# Altium PCB DigiTune.PcbDoc
Units mil, origin at the board's own origin, x right, y up, seen from the top; angles counter-clockwise.
Board outline 6194 x 2600 mil, 2 copper layers (Top Layer, Bottom Layer); 43 components, 27 nets, 237 pads, 0 vias.
Unrouted connection lines stored in the file: 2.
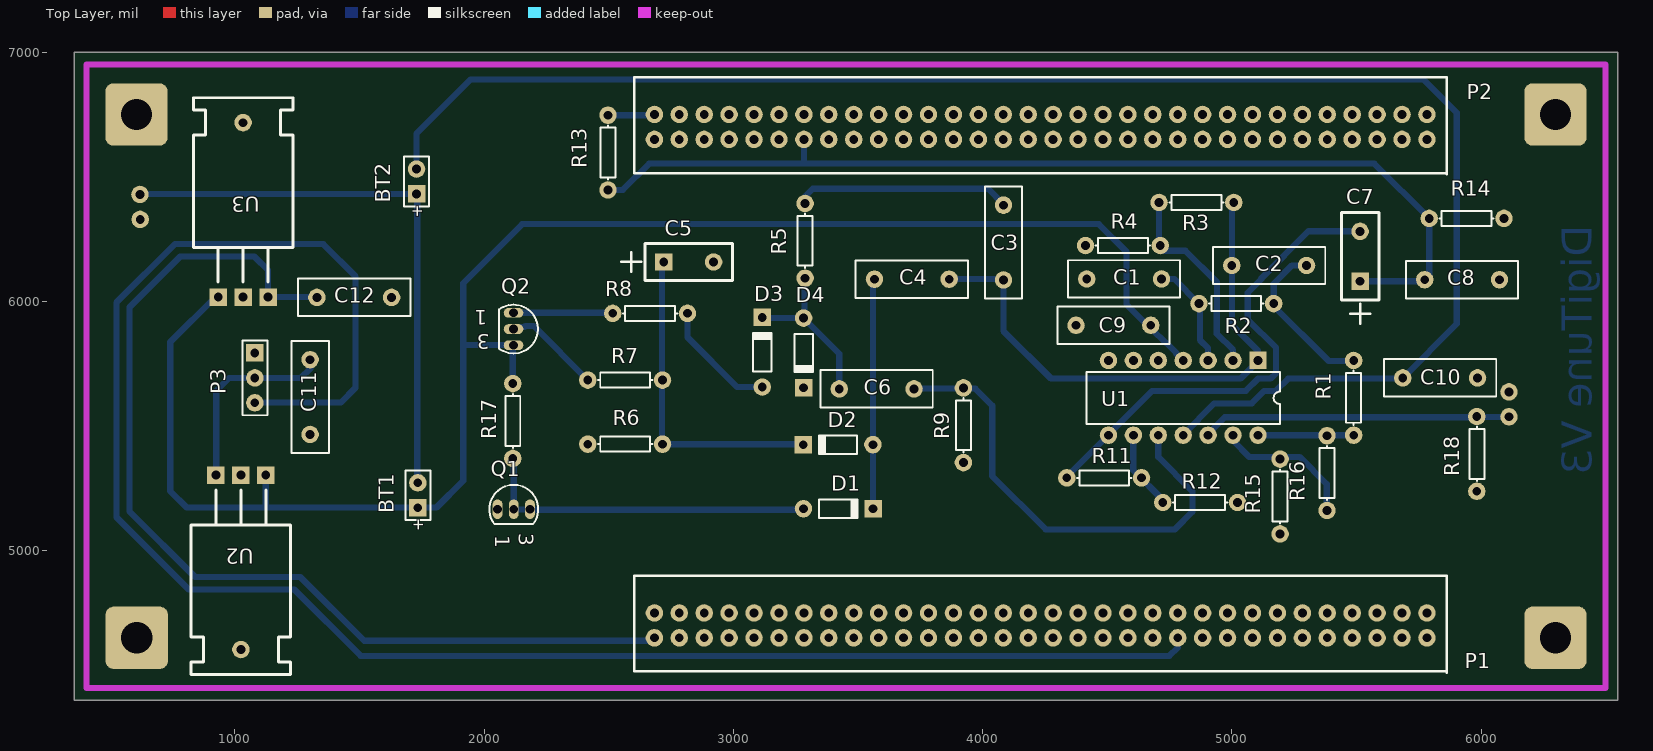
[diagram p0: Top Layer view]
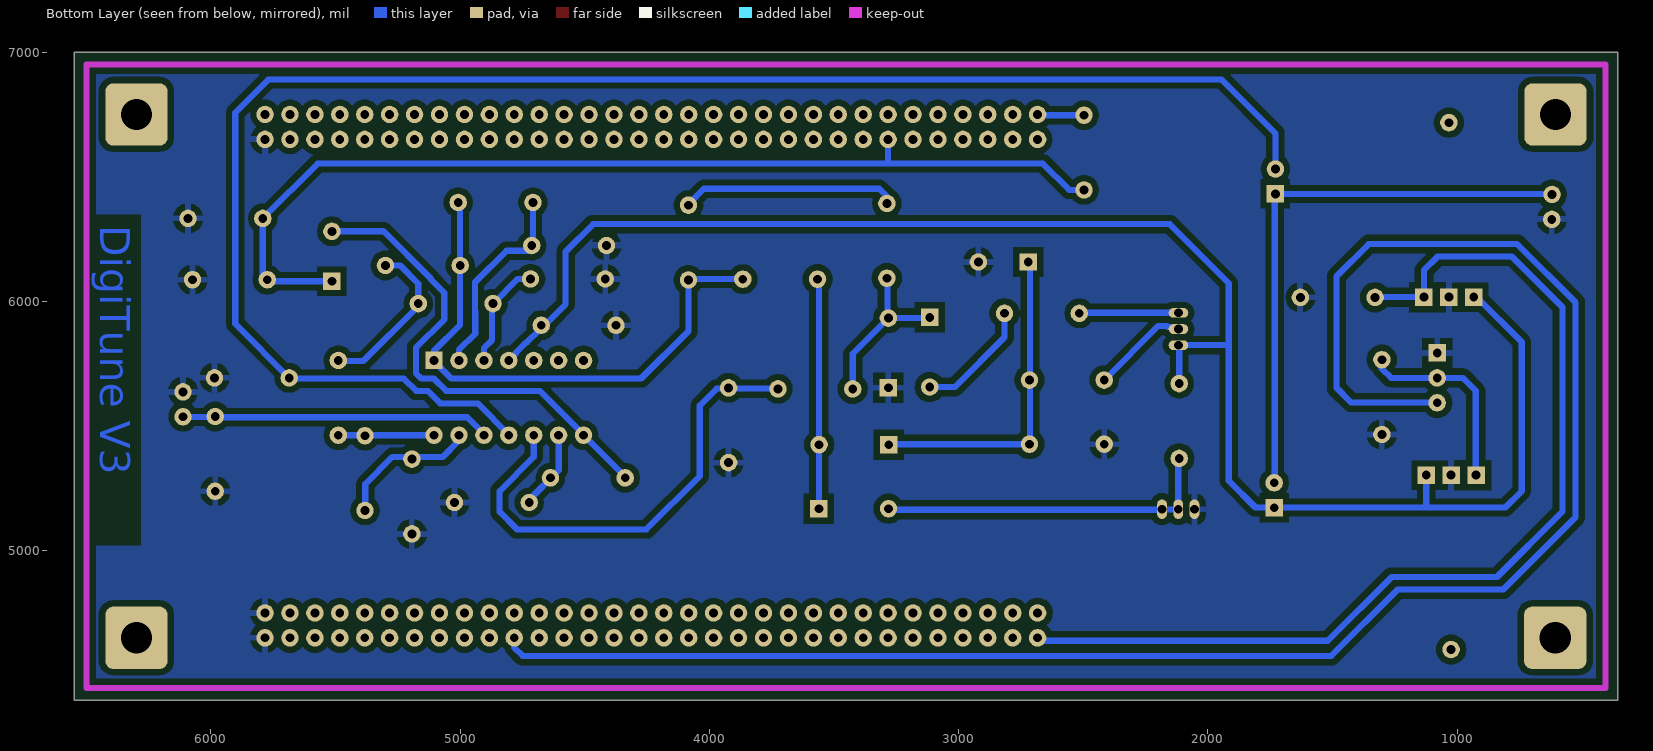
[diagram p1: Bottom Layer view, seen from below]

## Layer stack, top to bottom
Top Layer: signal copper 1.4
Dielectric: dielectric 12.6, FR-4, Dk 4.8
Bottom Layer: signal copper 1.4

## Board outline
355,4400 6549,4400 6549,7000 355,7000

## Design rules (kind name [scope] priority, off if disabled: settings)
Clearance [All] p1: gap=25
HoleSize [All] p1: absolutevalues=TRUE maxlimit=125 minlimit=1 maxpercent=80.000 minpercent=20.000
PlaneClearance [All] p1: clearance=25
PlaneConnect [All] p1: planeconnectstyle=Relief reliefexpansion=20 reliefentries=4 reliefconductorwidth=25 reliefairgap=20
PolygonConnect [All] p1: connectstyle=Relief reliefconductorwidth=25 reliefentries=4 polygonreliefangle="90 Angle" airgapwidth=25
RoutingLayers [All] p1: top layer_v5=FALSE bottom layer_v5=TRUE
RoutingVias [All] p1: holewidth=35 width=70 viastyle="Through Hole" minholewidth=28 minwidth=70 maxholewidth=35 maxwidth=70
SolderMaskExpansion [All] p1: expansion=4
Width [All] p1: maxlimit=30 minlimit=25 preferedwidth=30
24 further rules are at their usual default settings.

## Classes and differential pairs
component class STM32Headers: P1 P2

## Components (designator, comment, footprint, x,y, rotation, side; value= is the part's Value field where it differs from the comment)
BT1 "+9V" BAT-2 1734,5222 r90 top
BT2 "-9V" BAT-2 1729,6481 r90 top
C1 "15nF" RAD-0.3 4568,6090 r0 top
C2 "15nF" RAD-0.3 5150,6144 r180 top
C3 "220nF" RAD-0.3 4084,6236 r90 top
C4 "470nF" RAD-0.3 3716,6089 r180 top
C5 "2.2uF" RAD0.2-POL 2721,6158 r0 top
C6 "220nF" RAD-0.3 3575,5649 r0 top
C7 "0.1uF" RAD0.2-POL 5515,6081 r90 top
C8 "0.1uF" RAD-0.3 5924,6087 r0 top
C9 "0.1uF" RAD-0.3 4525,5904 r180 top
C10 "0.1uF" RAD-0.3 5836,5693 r180 top
C11 "0.1uF" RAD-0.3 1302,5616 r90 top
C12 "0.1uF" RAD-0.3 1479,6016 r180 top
D1 "Diode 1N34A" DO-35 3421,5168 r0 top
D2 "Diode 1N34A" DO-35 3420,5425 r180 top
D3 "Diode 1N34A" DO-35 3116,5796 r90 top
D4 "Diode 1N34A" DO-35 3282,5793 r270 top
P1 "Header2" STM32F4DiscoHeader 5883,4650 r90 top
P2 "Header1" STM32F4DiscoHeader 5883,6650 r90 top
P3 "Motor Header" HDR1X3 1080,5793 r270 top
Q1 "2N3904" TO-226AE 2119,5166 r270 top
Q2 "2N3904" TO-226AE 2118,5889 r180 top
R1 "16k" AXIAL-0.3 5489,5613 r90 top
R2 "16k" AXIAL-0.3 5018,5991 r180 top
R3 "2k7" AXIAL-0.3 4858,6397 r0 top
R4 "4k7" AXIAL-0.3 4563,6224 r0 top
R5 "10K" AXIAL-0.3 3288,6243 r270 top
R6 "240k" AXIAL-0.3 2566,5427 r0 top
R7 "100" AXIAL-0.3 2566,5684 r180 top
R8 "6.8K" AXIAL-0.3 2666,5952 r180 top
R9 "100K" AXIAL-0.3 3923,5503 r90 top
R11 "100K" AXIAL-0.3 4488,5292 r180 top
R12 "10K" AXIAL-0.3 4873,5193 r180 top
R13 "100K" AXIAL-0.3 2497,6597 r90 top
R14 "100K" AXIAL-0.3 5942,6333 r180 top
R15 "50K" AXIAL-0.3 5194,5217 r270 top
R16 "100K" AXIAL-0.3 5382,5311 r270 top
R17 "10k" AXIAL-0.3 2115,5520 r90 top
R18 "500k" AXIAL-0.3 5983,5388 r90 top
U1 "TL074N" N014 4805,5613 r180 top
U2 "LM7806CT" TO-220 1124,5303 r180 top
U3 "LM7805CT" TO-220 933,6017 r0 top

## Footprints (in the part's own frame and the unit in brackets; to place one, negate y for a bottom-side part, rotate by r counter-clockwise, add the part's x,y. Pads: shape width x height; smd on the part's side, far side on the other; paste and mask are expansions set on the pad)
AXIAL-0.3 [mil] "Axial Device, Thru-Hole; 2 Leads; 0.3 in Pin Spacing"
  round 70 hole 35.43: 1(-150,0) 2(150,0)
  silkscreen extent -109,-30 109,30
BAT-2 [mil] "Battery; 2 Leads"
  rect 70x70 hole 35.43: 1(-50,0)
  round 70 hole 35.43: 2(50,0)
  silkscreen extent -100,-50 100,50
DO-35 [mil] "Diode, Axial; Body 3.8 x 1.9 mm (LxDia. max), Lead Dia. 0.53 mm (max)"
  round 70 hole 35.43: 1(-139.76,0)
  rect 70x70 hole 35.43: 2(139.76,0)
  silkscreen extent -77,-37 81,37
HDR1X3 [mil] "Connector; Header; 3 Position"
  rect 70x70 hole 35.43: 1(0,0)
  round 70 hole 35.43: 2(100,0) 3(200,0)
  silkscreen extent -50,-50 250,50
N014 [mil] "DIP; 14 Leads; Row Spacing 7.62 mm; Pitch 2.54 mm"
  rect 70x70 hole 35.43: 1(-300,-150)
  round 70 hole 35.43: 2(-200,-150) 3(-100,-150) 4(0,-150) 5(100,-150) 6(200,-150) 7(300,-150) 8(300,150) 9(200,150) 10(100,150) 11(0,150) 12(-100,150) 13(-200,150) 14(-300,150)
  silkscreen extent -388,-104 388,104
RAD0.2-POL [mil]
  rect 70x70 hole 35.43: 1(0,0)
  round 70 hole 35.43: 2(200,0)
  silkscreen extent -170,-75 275,75
RAD-0.3 [mil] "Radial Cap, Thru-Hole; 2 Leads; 0.3 in Pin Spacing"
  round 70 hole 35.43: 1(-150,0) 2(150,0)
  silkscreen extent -225,-75 225,75
STM32F4DiscoHeader [mil]
  round 70 hole 35.43: 1(0,3200) 2(100,3200) 3(0,3100) 4(100,3100) 5(0,3000) 6(100,3000) 7(0,2900) 8(100,2900) 9(0,2800) 10.(100,2800) 11(0,2700) 12(100,2700) 13(0,2600) 14(100,2600) 15(0,2500) 16(100,2500) 17(0,2400) 18(100,2400) 19(0,2300) 20(100,2300) 21(0,2200) 22(100,2200) 23(0,2100) 24(100,2100) 25(0,2000) 26(100,2000) 27(0,1900) 28(100,1900) 29(0,1800) 30(100,1800) 31(0,1700) 32(100,1700) 33(0,1600) 34(100,1600) 35(0,1500) 36(100,1500) 37(0,1400) 38(100,1400) 39(0,1300) 40(100,1300) 41(0,1200) 42(100,1200) 43(0,1100) 44(100,1100) 45(0,1000) 46(100,1000) 47(0,900) 48(100,900) 49(0,800) 50(100,800) 51(0,700) 52(100,700) 53(0,600) 54(100,600) 55(0,500) 56(100,500) 57(0,400) 58(100,400) 59(0,300) 60(100,300) 61(0,200) 62(100,200) 63(0,100) 64(100,100)
  silkscreen extent -140,20 250,3280
TO-220 [mil]
  round 70 hole 35.43: 0(100,700)
  rect 70x70 hole 35.43: 1(0,0) 2(100,0) 3(200,0)
  silkscreen extent -100,60 300,800
TO-226AE [mm] "TO, Flat Index; 3 In-Line, Axial Leads; Body Dia. 4.5mm; Leads 0.51 x 0.48 mm (max)"
  oval 2x1 hole 0.9: 1(0,-1.651) 2(0,0) 3(0,1.651)
  silkscreen extent -2.48,-2.48 1.5,2.48

## Part data
BT1 BT2: library part Battery, "Multicell Battery"
C1 C2 C3 C4 C6 C8 C9 C10 C11 C12: library part Cap, "Capacitor"
C5 C7: library part "Cap Pol1", "Polarized Capacitor (Radial)"
D1 D2 D3 D4: library part "Diode 1N914", "High Conductance Fast Diode"
P1: library part Component_1
P2: library part Component_1, "Header for STM32F429 pinout"
P3: library part "Header 3", "Header, 3-Pin"
Q1 Q2: "NPN General Purpose Amplifier"
R1 R2 R3 R4 R5 R6 R7 R8 R9 R11 R12 R13 R14 R15 R16 R17 R18: library part Res1, "Resistor"
U1: "Low-Noise JFET-Input Operational Amplifier"
U2 U3: library part LM7805CT(3), "Three Terminal Voltage Regulator"

## Free pads (board coordinates)
  round 70 hole 35.43: 0(619,6429) 1(6112,5537) 2(6112,5637) 5(620,6329)
  rrect25% 250x250 hole 125: 2(605,6750) 3(606,4650) 4(6299,6750) 5(6299,4650)

## Nets (pads, with @x,y where several pads share a name; then routed paths per layer and width w, separated by ;. In a path a pad name is that pad's centre, name@x,y a point inside that pad or via, vN(x,y) a via of type N, cw(c..) or ccw(c..) an arc to the next point about the centre after c; other vN are vias at no path point)
GND: C1.1 C5.2 C8.2 C9.2 C10.1 C11.1 C12.1 D4.2 P1.63 P1.64 P2.63 P2.64 P3.1 pad.2@6112,5637 pad.5@620,6329 Q1.1 R4.1 R6.1 R9.1 R12.1 R14.1 R15.2 R18.1 U2.2 U3.2
NetC1_2: C1.2 R2.2 U1.3 | length 428.7
  Bottom Layer w25: C1.2 4769,6090 R2.2 ; R2.2@4872,5987 4872,5845 4905,5812 U1.3
NetC2_1: C2.1 R1.2 R2.1 | length 666.4
  Bottom Layer w25: C2.1 5241,6144 5168,6071 R2.1 5168,5981 5388,5761 R1.2@5491,5761
NetC2_2: C2.2 C3.1 C4.1 R3.2 U1.1 | length 2237.7
  Bottom Layer w25: C4.1@3866,6090 4084,6090 4084,5881 4274.5,5690.5 5035.03,5690.5 5105,5760.47 U1.1 5105,5802 5000.5,5906.5 R3.2@5000.5,6399
NetC3_2: C3.2 R5.1 | length 862.6
  Bottom Layer w25: R5.1 3288,6421.12 3318.88,6452 4022,6452 C3.2@4084,6390
NetC4_2: C4.2 D1.2 D2.1 | length 921
  Bottom Layer w25: D1.2 C4.2@3560.76,6089
NetC5_1: C5.1 D2.2 R6.2 R7.1 | length 1318.2
  Bottom Layer w25: R6.2@2714,5427 D2.2@3280.24,5427 ; R6.2 2714,5429 2714,6140 C5.1@2741,6167
NetC6_1: C6.1 D3.2 D4.1 R5.2 | length 664.8
  Bottom Layer w25: D3.2@3116,5933.76 3283,5933.76 3286,5936.76 R5.2@3286,6093 ; D4.1@3286,5928.76 3425,5789.76 C6.1
NetC6_2: C6.2 R9.2 U1.10 | length 1910.6
  Bottom Layer w25: C6.2@3725,5650 3971,5650 4039,5582 4039,5299 4253,5085 4772,5085 4842,5155 4842,5239 4705,5376 U1.10
NetC7_1: C7.1 C8.1 P2.13 R13.1 R14.2 | length 4056.4
  Bottom Layer w25: R13.1 2556,6447 2662,6553 3282,6553 ; P2.13 3283,6554 3282,6553 ; C7.1 5792,6081 R14.2 5572,6553 3282,6553
NetC7_2: C7.2 R11.2 U1.8 | length 1940.3
  Bottom Layer w25: R11.2@4336,5294 U1.8 4505,5465.53 4679.97,5640.5 5055.74,5640.5 5105.74,5690.5 5155.53,5690.5 5177.5,5712.47 5177.5,5813.53 5064,5927.03 5064,6035 5118,6089 5118,6091.71 5307.29,6281 C7.2
NetC11_2: C11.2 P3.2 U2.3 | length 787.9
  Bottom Layer w25: U2.3@925,5303 925,5641 977,5693 P3.2 1265,5693 1302,5730 C11.2
NetC12_2: C12.2 P1.1 U3.3 | length 4107.4
  Bottom Layer w25: C12.2@1329,6017 U3.3 1133,6125 1078,6180 780,6180 577.5,5977.5 577.5,5156.5 840,4894 1263,4894 1519,4638 P1.1@2683,4638
NetD1_1: D1.1 Q1.2 Q1.3 R17.1 | length 1367.5
  Bottom Layer w25: Q1.2@2113.76,5164.92 2119.02,5165 Q1.3 ; Q1.2 R17.1@2119,5366 ; Q1.3@2184,5164 D1.1@3281.24,5164
NetD3_1: D3.1 R8.1 | length 487.2
  Bottom Layer w25: R8.1 2816,5856 3015.76,5656.24 3111.76,5656.24 D3.1@3120.76,5647.24
NetP1_43: P1.43 P3.3 | length 7388.5
  Bottom Layer w25: P3.3@1080,5594 1425,5594 1484,5653 1484,6100.07 1354.07,6230 759.29,6230 525,5995.71 525,5134 815,4844 1238.75,4844 1505.25,4577.5 4749.5,4577.5 4783,4611 P1.43
NetP2_2: P2.2 R13.2 | length 183
  Bottom Layer w25: R13.2 P2.2@2680,6747
NetQ2_1: Q2.1 R8.2 | length 388.2
  Bottom Layer w25: Q2.1@2121,5957 Q2.1 R8.2@2502,5954
NetQ2_2: Q2.2 R7.2 | length 382.2
  Bottom Layer w25: Q2.2@2125.82,5896.81 2161.37,5896.81 2166.06,5901.5 2198.5,5901.5 R7.2
NetR1_1: R1.1 R16.1 U1.14 | length 384.4
  Bottom Layer w25: U1.14 5488,5463 R1.1@5489,5464
NetR3_1: R3.1 R4.2 U1.2 | length 819.5
  Bottom Layer w25: R3.1 4708,6203 4814,6203 4940.5,6076.5 4940.5,5960.97 4940,5960.47 4940,5870 5005,5805 U1.2
NetR11_1: R11.1 R12.2 U1.9 | length 320.9
  Bottom Layer w25: U1.9 4605,5322 R12.2@4728,5199 ; R12.2@4729,5193 R12.2@4729,5199
NetR15_1: R15.1 R16.2 U1.13 | length 584.7
  Bottom Layer w25: U1.13 5005,5440 5069,5376 5272,5376 5381,5267 R16.2@5381,5153
NetR18_2: pad.1 R18.2 U1.12 | length 1252.8
  Bottom Layer w25: U1.12 4905,5469.07 4971.43,5535.5 R18.2@5983,5535.5 ; R18.2@5979,5548 R18.2@5982,5551 ; R18.2@5989.5,5542 5983.5,5536 pad.1@6112,5536
Switch: BT1.2 BT2.1 pad.0 | length 2269
  Bottom Layer w25: pad.0@619,6431 BT2.1 ; BT1.2@1732,5272 BT2.1@1732,6431
VCC: BT1.1 C9.1 Q2.3 R17.2 U1.4 U2.1 U3.1 | length 6718
  Bottom Layer w25: U3.1 921,6017 741,5837 741,5239 807,5173 1809,5173 1916,5280 1916,6073 2153,6310 4467,6310 4577,6200 4577,5989 4681,5885 4683,5885 4732.5,5835.5 4735.03,5835.5 4777.5,5793.03 4777.5,5790.5 U1.4 ; 1124,5173 U2.1 ; 1924,5825 Q2.3 ; R17.2 Q2.3@2115,5821
VDD: BT2.2 C10.2 U1.11 | length 6593.2
  Bottom Layer w25: BT2.2 1729,6674 1945,6890 5770,6890 5903,6757 5903,5910 5683,5690 5225.74,5690 5176.24,5640.5 5130.5,5640.5 5080.5,5590.5 4929.97,5590.5 4805,5465.53 U1.11
pads on no net: P1.2 P1.3 P1.4 P1.5 P1.6 P1.7 P1.8 P1.9 P1.10. P1.11 P1.12 P1.13 P1.14 P1.15 P1.16 P1.17 P1.18 P1.19 P1.20 P1.21 P1.22 P1.23 P1.24 P1.25 P1.26 P1.27 P1.28 P1.29 P1.30 P1.31 P1.32 P1.33 P1.34 P1.35 P1.36 P1.37 P1.38 P1.39 P1.40 P1.41 P1.42 P1.44 P1.45 P1.46 P1.47 P1.48 P1.49 P1.50 P1.51 P1.52 P1.53 P1.54 P1.55 P1.56 P1.57 P1.58 P1.59 P1.60 P1.61 P1.62 P2.1 P2.3 P2.4 P2.5 P2.6 P2.7 P2.8 P2.9 P2.10. P2.11 P2.12 P2.14 P2.15 P2.16 P2.17 P2.18 P2.19 P2.20 P2.21 P2.22 P2.23 P2.24 P2.25 P2.26 P2.27 P2.28 P2.29 P2.30 P2.31 P2.32 P2.33 P2.34 P2.35 P2.36 P2.37 P2.38 P2.39 P2.40 P2.41 P2.42 P2.43 P2.44 P2.45 P2.46 P2.47 P2.48 P2.49 P2.50 P2.51 P2.52 P2.53 P2.54 P2.55 P2.56 P2.57 P2.58 P2.59 P2.60 P2.61 P2.62 U1.5 U1.6 U1.7 U2.0 U3.0

## Polygon pours and split planes (outlines as drawn)
GND on Bottom Layer "Bottom Layer-No Net" (solid, pour order 9): 405,6950 405,4449 6499,4449 6499,6950

## Keep-outs
Keep-Out Layer:
  lines w25: 405,4449 6499,4449 6499,6950 405,6950 405,4449

## Other copper
Bottom Layer:
  text "DigiTune V3" at 6445,6305 h120 r90

## Silkscreen, mask and mechanical layers (free items; w line width, h text height)
Drill Drawing:
  lines w1: 806.12,2922 856.12,2922 856.12,2972 806.12,2972 806.12,2922 ; 806.12,3072 831.12,3084.5 856.12,3072 843.62,3097 856.12,3122 831.12,3109.5 806.12,3122 818.62,3097 806.12,3072
  lines w15: 738,2877 4616.97,2877 ; 738,3177 4616.97,3177 ; 1288.88,2727 1288.88,3327 ; 1986.69,2727 1986.69,3327 ; 3332.29,2727 3332.29,3327 ; 3838.17,2727 3838.17,3327 ; 738,2727 4616.97,2727 4616.97,3327 738,3327 738,2727
  text "Symbol" at 828,3222 h72
  text "Hit Count" at 1333.88,3222 h72
  text "Finished Hole Size" at 2031.69,3222 h72
  text "Plated" at 3377.29,3222 h72
  text "Hole Type" at 3883.17,3222 h72
  text "4" at 1333.88,3072 h60
  text "125.00mil (3.175mm)" at 2031.69,3072 h60
  text "PTH" at 3377.29,3072 h60
  text "Round" at 3883.17,3072 h60
  text "233" at 1333.88,2922 h60
  text "35.43mil (0.900mm)" at 2031.69,2922 h60
  text "PTH" at 3377.29,2922 h60
  text "Round" at 3883.17,2922 h60
  text "237 Total" at 1333.88,2772 h60

## Dimensions
5858,4515 to 6549,4400 on Mechanical 1
5858,6515 to 6549,7000 on Mechanical 1
6549,7000 to 6549,4400 on Mechanical 1
2603,4515 to 355,4400 on Mechanical 1
5863,4510 to 6549,4400 on Mechanical 1
355,4400 to 6549,4400 on Mechanical 1
6299,6750 to 6549,7000 on Mechanical 1
6299,6750 to 6549,7000 on Mechanical 1
6049,4356 to 1352,4394 on Mechanical 1
6549,4279 to 6049,4326 on Mechanical 1
355,4400 to 1352,4394 on Mechanical 1
5783,4650 to 6549,4400 on Mechanical 1
355,7000 to 405,6950 on Mechanical 1
355,7000 to 605,6750 on Mechanical 1
355,7000 to 605,6750 on Mechanical 1
355,4400 to 606,4650 on Mechanical 1
355,4400 to 606,4650 on Mechanical 1
5783,6750 to 5783,4650 on Mechanical 1
6112,5637 to 6112,5537 on Mechanical 1
619,6429 to 620,6329 on Mechanical 1

## Text inside footprints (layer, text, board x,y; h text height)
BT1: Top Overlay "+" at 1756.72,5077.51 h45.28 r90
BT2: Top Overlay "+" at 1751.72,6336.51 h45.28 r90
Q1: Top Overlay "3" at 2139.08,5070.33 h59.05 r270; Top Overlay "1" at 2044.2,5061.28 h59.05 r270
Q2: Top Overlay "3" at 2022.33,5868.92 h59.05 r180; Top Overlay "1" at 2013.28,5963.8 h59.05 r180